# Altium PCB bottom.PcbDoc
Units mil, origin at the board's own origin, x right, y up, seen from the top; angles counter-clockwise.
Board outline 6149.85 x 4650 mil, 2 copper layers (Top Layer, Bottom Layer); 17 components, 14 nets, 128 pads, 36 vias.
Unrouted connection lines stored in the file: 15.
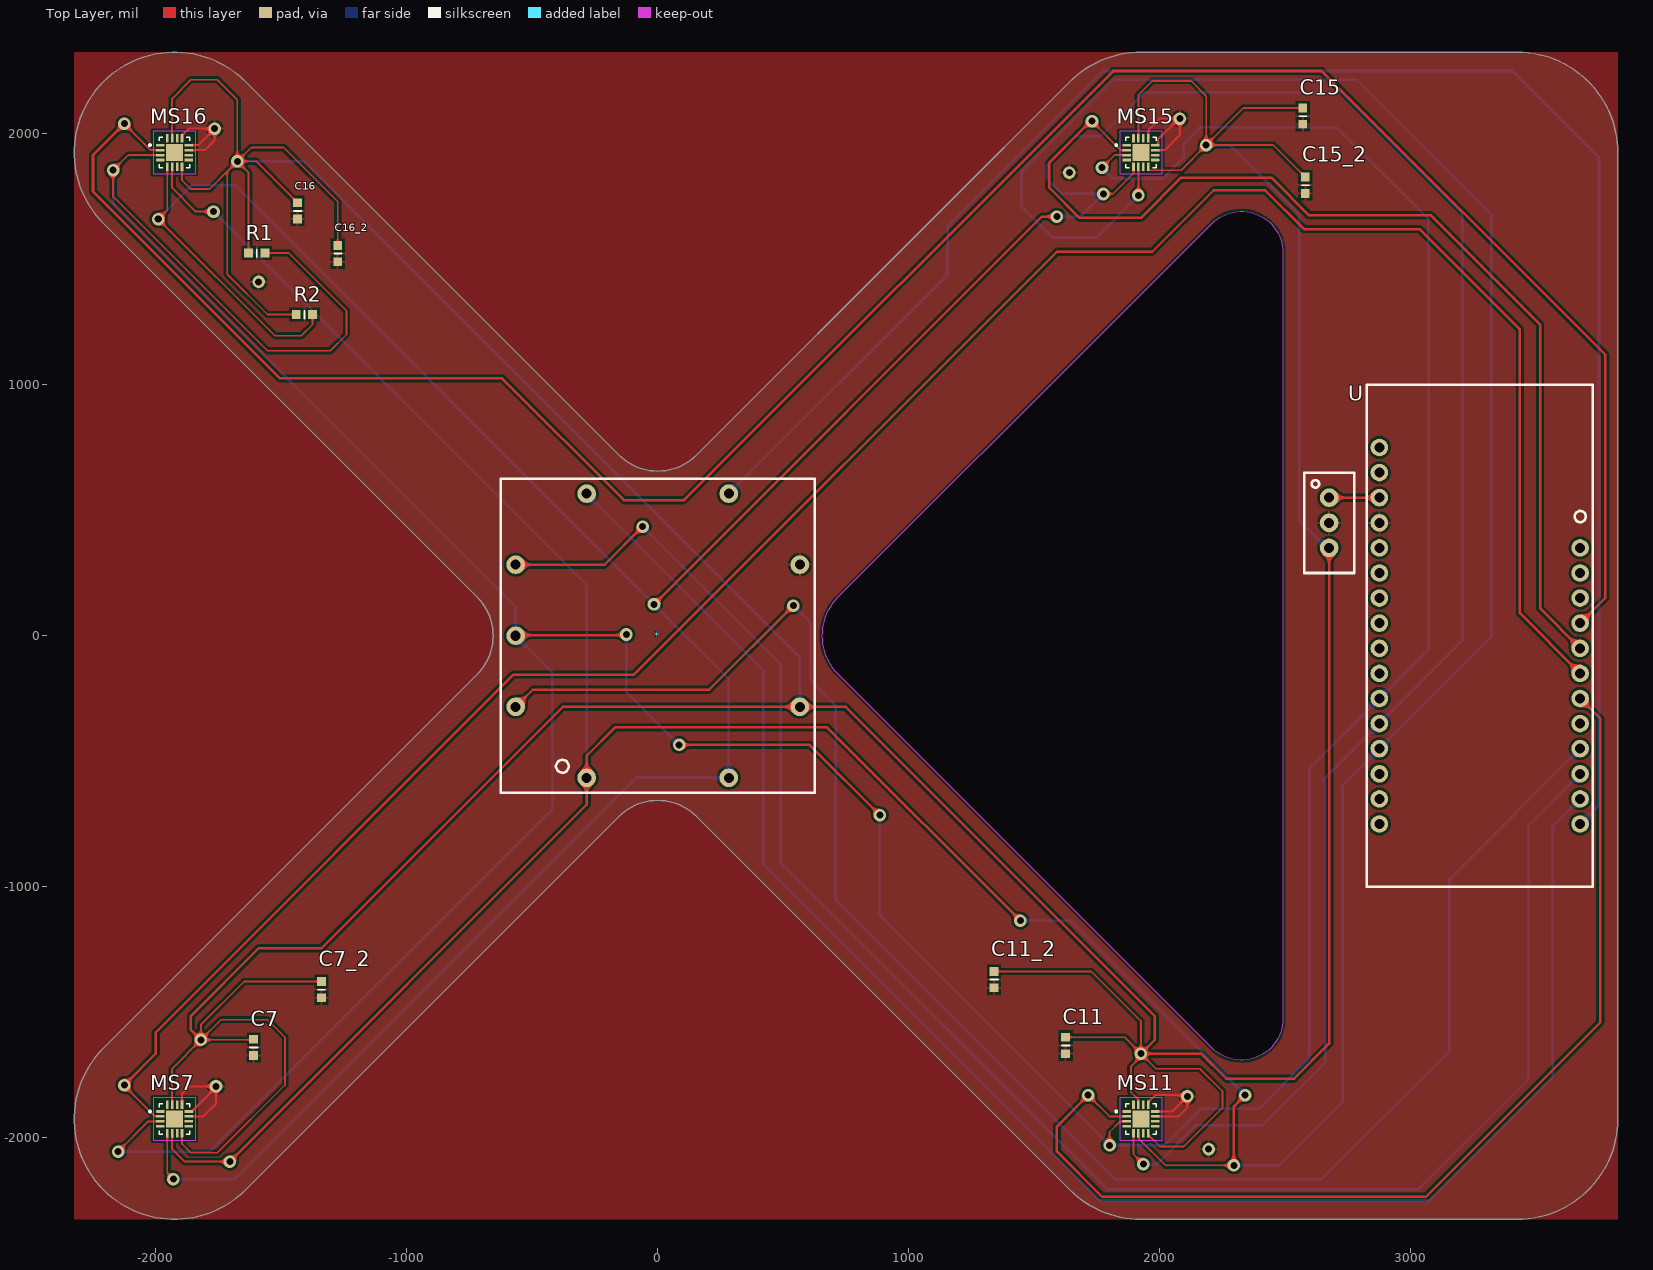
[diagram p0: Top Layer view]
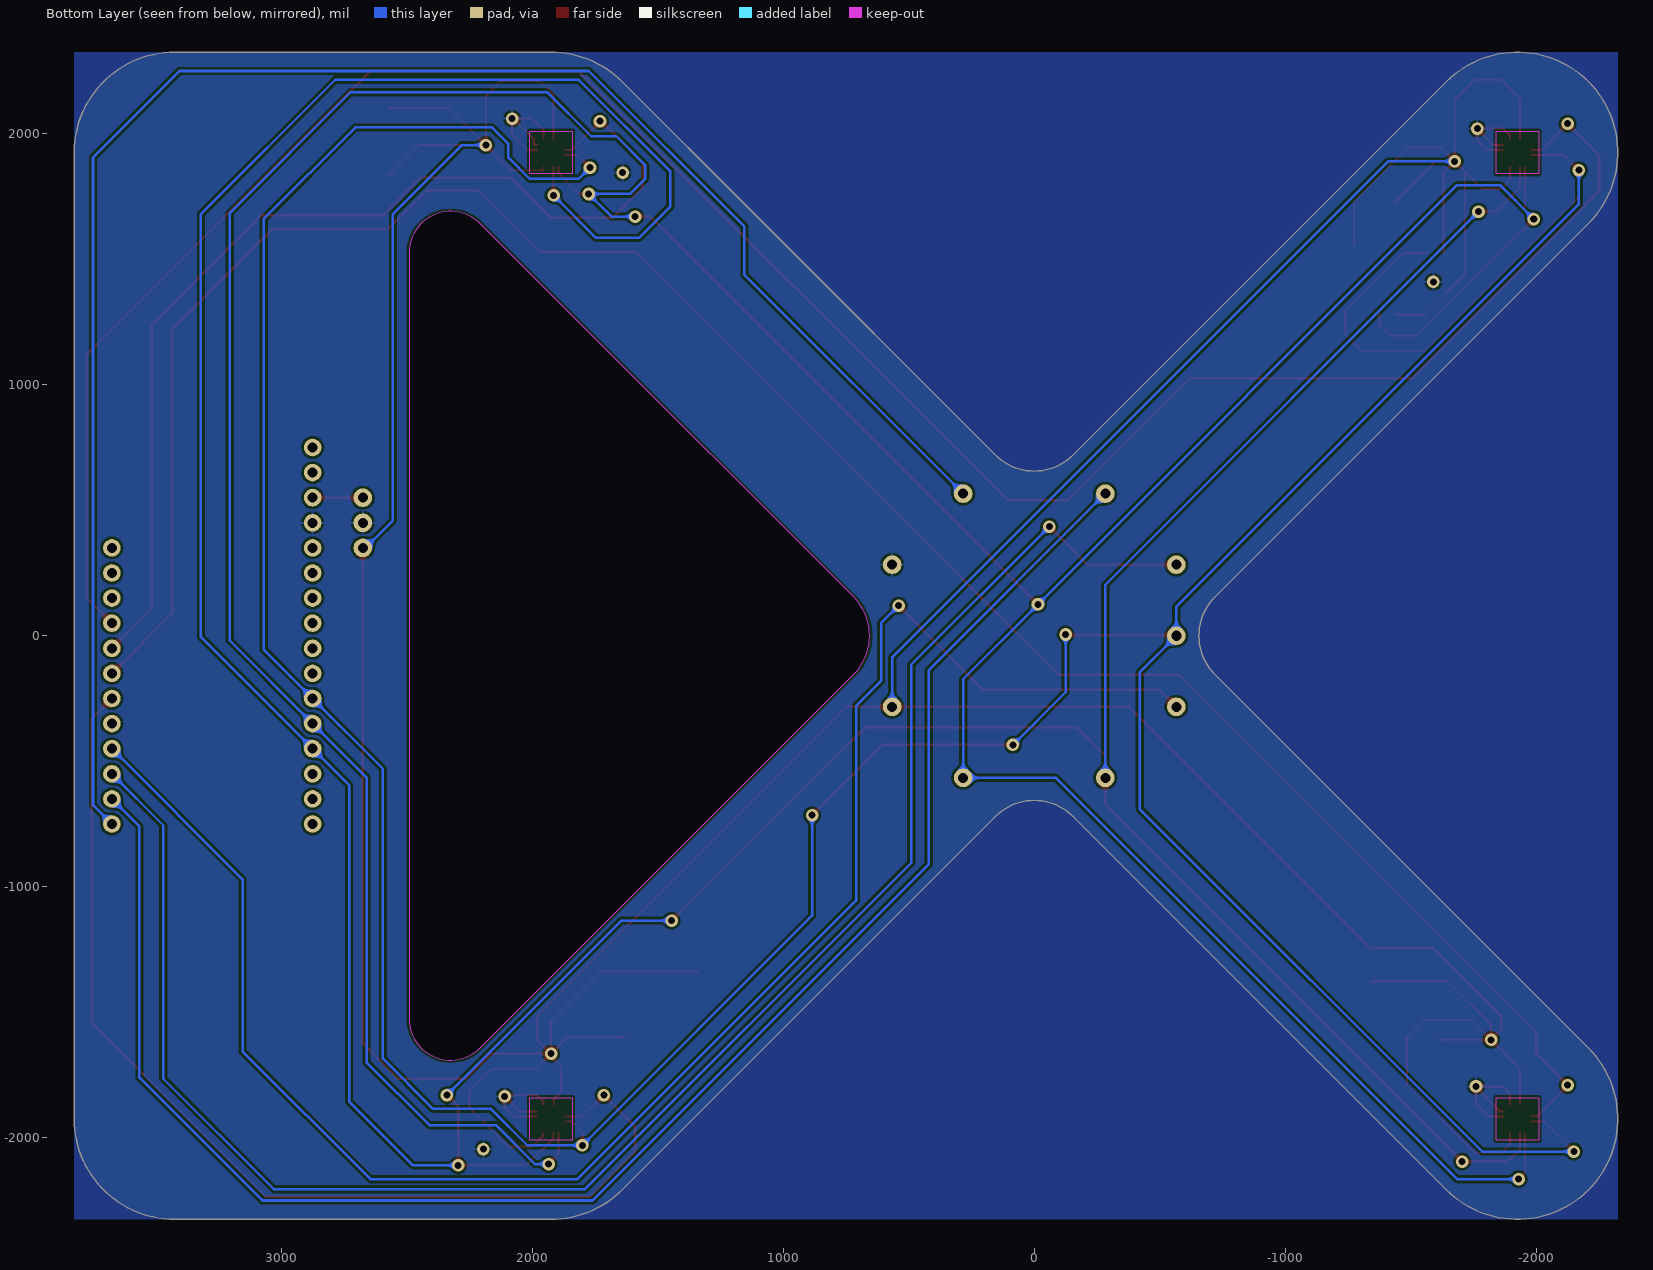
[diagram p1: Bottom Layer view, seen from below]
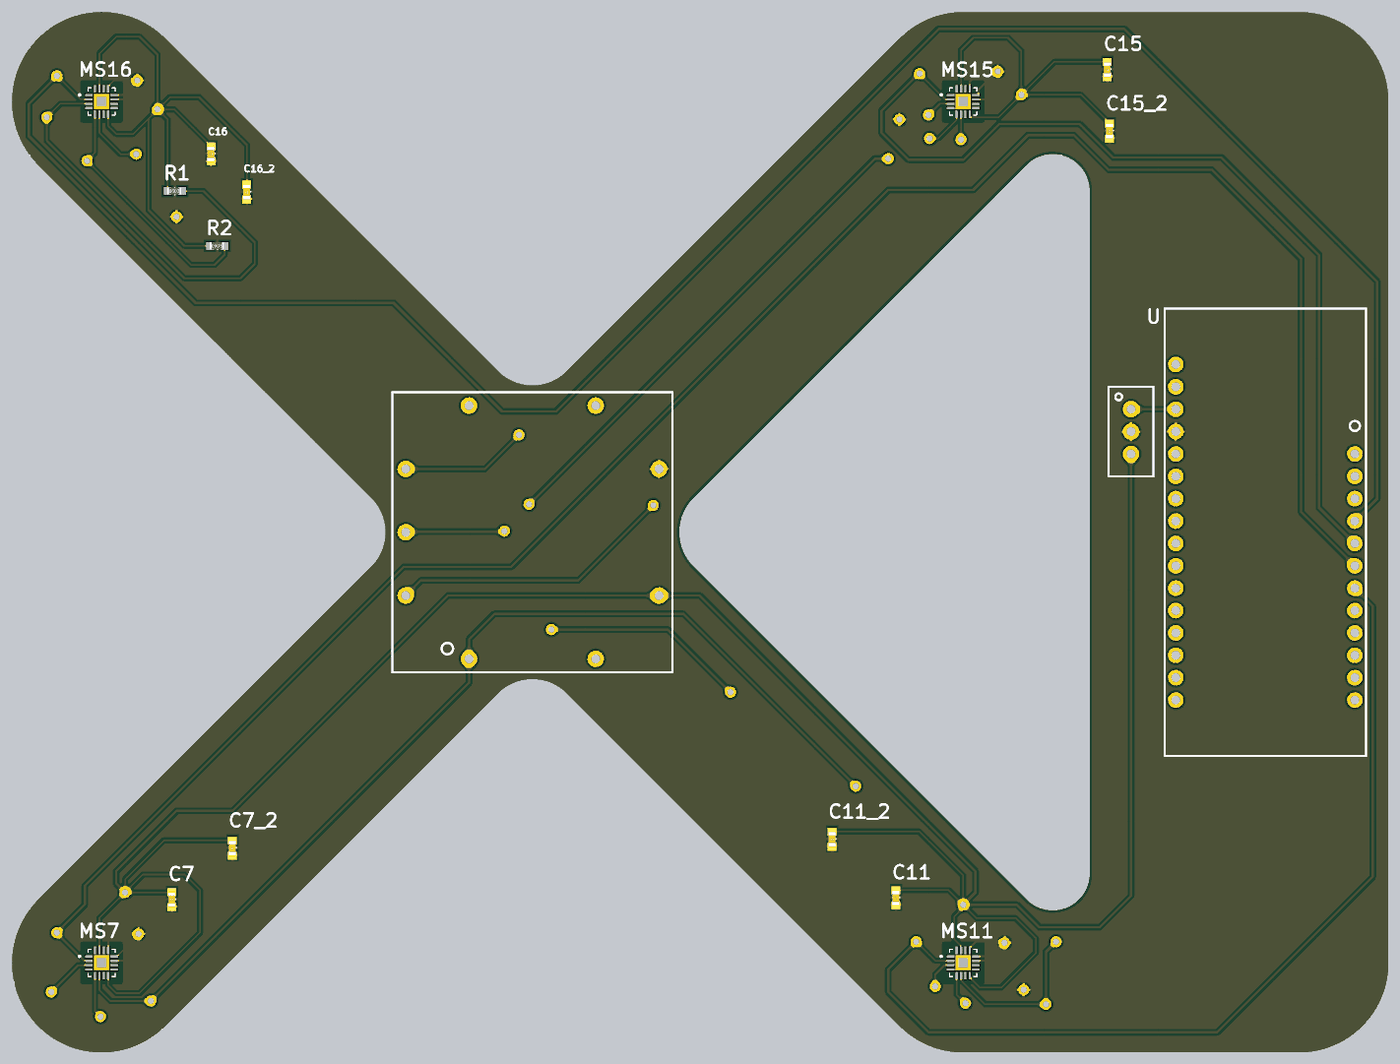
[diagram p2: 3D render of the assembled board from above, using the file's embedded part models]

## Layer stack, top to bottom
Top Solder: solder mask 0.4, Solder Resist, Dk 3.5
Top Layer: signal copper 1.4
Dielectric 1: dielectric 12.6, FR-4, Dk 4.8
Bottom Layer: signal copper 1.4
Bottom Solder: solder mask 0.4, Solder Resist, Dk 3.5

## Board outline
-1642.16,-2207.84 cw(c-1925,-1925) -2207.84,-1642.16 -719.9,-154.21 ccw(c-874.31,0) -720.1,154.42 -2012.84,1447.16 -2207.84,1642.16 cw(c-1925,1925) -1642.16,2207.84 -1367.16,1932.84 -154.21,719.9 ccw(c0,874.31) 154.31,720 1117.66,1683.35 1642.16,2207.84 cw(c1925,1925) 1925,2325 3425,2325 cw(c3425,1925) 3825,1925 3825,-1925 cw(c3425,-1925) 3425,-2325 1925,-2325 cw(c1925,-1925) 1642.16,-2207.84 154.42,-720.1 ccw(c0,-874.31) -154.42,-720.1
cut-out: 2207.79,-1642.11 720,-154.31 cw(c874.31,0) 720.1,154.42 1847.84,1282.16 2207.84,1642.16 2207.79,1642.11 cw(c2325,1525) 2490.69,1525 2490.69,-1525 cw(c2325,-1525)

## Design rules (kind name [scope] priority, off if disabled: settings)
Clearance [All] p1: gap=10 ignorepadtopadclearanceinfootprint=FALSE except(0: Arc-Hole Track-Hole SMDPad-Hole THPad-Hole Via-Hole Fill-Hole Poly-Hole Region-Hole Text-Hole)
PolygonConnect [All] p1: connectstyle=Relief reliefconductorwidth=10 reliefentries=4 polygonreliefangle="90 Angle" airgapwidth=10
RoutingVias [All] p1: holewidth=28 width=50 viastyle="Through Hole" minholewidth=28 minwidth=50 maxholewidth=28 maxwidth=50
SolderMaskExpansion [All] p1: expansion=4 istentingtop=FALSE
Width [All] p1: maxlimit=10 minlimit=8 preferedwidth=10 bottomlayer_minwidth=10 minimp=50.000000 maximp=50.000000 favimp=50.000000
30 further rules are at their usual default settings.

## Classes and differential pairs
component class MAGNETO: * C7 C7_2 C11 C11_2 C15 C15_2 C16 C16_2 MS7 MS11 MS15 MS16 R1 R2

## Components (designator, comment, footprint, x,y, rotation, side; value= is the part's Value field where it differs from the comment)
* "PIN9_small" PIN9_small 0,0 r0 top
C7 "0.1uF" CAP_0603 -1610,-1640 r90 top
C7_2 "0.1uF" CAP_0603 -1340,-1410 r90 top
C11 "0.1uF" CAP_0603 1625,-1632.5 r90 top
C11_2 "0.1uF" CAP_0603 1340,-1370 r90 top
C15 "0.1uF" CAP_0603 2570,2070 r90 top
C15_2 "0.1uF" CAP_0603 2580,1795 r90 top
C16 "0.1uF" CAP_0603 -1435,1692.5 r90 top
C16_2 "0.1uF" CAP_0603 -1275,1522.5 r90 top
MS7 "MLX90393" MLX90393 -1925,-1925 r0 top
MS11 "MLX90393" MLX90393 1925,-1925 r0 top
MS15 "MLX90393" MLX90393 1925,1925 r0 top locked
MS16 "MLX90393" MLX90393 -1925,1925 r0 top
R1 "10k" RES_0603 -1597.5,1525 r0 top
R2 "10k" RES_0603 -1407.5,1280 r0 top
U "52832" feather 3275,0 r0 top
? "REGULATOR" "linear regulator" 2675,450 r0 top

## Footprints (in the part's own frame and the unit in brackets; to place one, negate y for a bottom-side part, rotate by r counter-clockwise, add the part's x,y. Pads: shape width x height; smd on the part's side, far side on the other; paste and mask are expansions set on the pad)
CAP_0603 [mil]
  rect 35x35 smd: 1(-32.5,0) 2(32.5,0)
  silkscreen extent 0,-16 0,14, body extent -53,-18 49,21, height 35
feather [mil]
  round 70 hole 40: 1(400,350) 2(400,250) 3(400,150) 4(400,50) 5(400,-50) 6(400,-150) 7(400,-250) 8(400,-350) 9(400,-450) 10(400,-550) 11(400,-650) 12(400,-750) 13(-400,750) 14(-400,650) 15(-400,550) 16(-400,450) 17(-400,350) 18(-400,250) 19(-400,150) 20(-400,50) 21(-400,-50) 22(-400,-150) 23(-400,-250) 24(-400,-350) 25(-400,-450) 26(-400,-550) 27(-400,-650) 28(-400,-750)
  silkscreen extent -450,-1000 450,1000
"linear regulator" [mil]
  round 74 hole 40: 1(0,100) 2(0,0) 3(0,-100)
  silkscreen extent -100,-200 100,200
MLX90393 [mm]
  rrect25% 0.86x0.26 smd: 1(-1.435,0.75) 2(-1.435,0.25) 3(-1.435,-0.25) 4(-1.435,-0.75) 9(1.435,-0.75) 10(1.435,-0.25) 11(1.435,0.25) 12(1.435,0.75)
  rrect25% 0.26x0.86 smd: 5(-0.75,-1.435) 6(-0.25,-1.435) 7(0.25,-1.435) 8(0.75,-1.435) 13(0.75,1.435) 14(0.25,1.435) 15(-0.25,1.435) 16(-0.75,1.435)
  rect 1.71x1.71 smd paste-2: 17(0,0)
  silkscreen extent -2.59,-1.55 1.55,1.55
PIN9_small [mil]
  round 74 hole 40: 1(-283,-566) 2(283,-566) 3(566,-283) 4(566,283) 5(283,566) 6(-283,566) 7(-566,283) 8(-566,0) 9(-566,-283)
  silkscreen extent -626,-626 626,626
RES_0603 [mil]
  rect 35x35 smd: 1(-32.5,0) 2(32.5,0)
  silkscreen extent 0,-16 0,14, body extent -34,-16 29,16, height 18

## Part data
C7 C7_2 C11 C11_2 C15 C15_2 C16 C16_2: library part CAP, "capacitance"
MS7 MS11 MS15 MS16: "sensor"
R1 R2: library part RES, "resistance"
U: library part Feather, "IC"
?: "linear regulator"

## Via types
v1: diameter 50, hole 28, Top Layer to Bottom Layer, 36 vias

## Nets (pads, with @x,y where several pads share a name; then routed paths per layer and width w, separated by ;. In a path a pad name is that pad's centre, name@x,y a point inside that pad or via, vN(x,y) a via of type N, cw(c..) or ccw(c..) an arc to the next point about the centre after c; other vN are vias at no path point)
GND: *.4 ?.2 C7.1 C7_2.1 C11.1 C11_2.1 C15.1 C15_2.1 C16.1 C16_2.1 MS7.11 MS7.12 MS7.13 MS11.11 MS11.12 MS11.13 MS15.11 MS15.12 MS15.13 MS16.11 MS16.12 MS16.13 U.16 | length 2026.2
  Top Layer w8: MS7.13 -1895.47,-1825.47 -1865,-1795 v1(-1760,-1795) v1@-1760,-1798.78 ; MS16.13 -1895.47,1993.31 -1878.78,2010 -1868.78,2020 v1(-1765,2020) ; MS7.11 -1810.16,-1915.16 -1760,-1865 v1@-1760,-1798.78 ; MS7.12 -1856.69,-1895.47 v1@-1760,-1798.78 ; MS16.11 -1805.16,1934.84 -1765,1975 v1(-1765,2020) ; MS16.12 -1830.47,1954.53 v1(-1765,2020) ; MS11.13 1954.53,-1856.69 1981.22,-1830 2105,-1830 v1(2110,-1835) ; MS15.13 1954.53,2014.53 2000,2060 v1@2075,2060 ; MS11.11 2074.84,-1915.16 2110,-1880 v1(2110,-1835) ; MS11.12 2049.53,-1895.47 v1(2110,-1835) ; MS15.11 2019.84,1934.84 2080,1995 v1(2080,2060) v1@2075,2060 ; MS15.12 1992.03,1954.53 1993.15,1955.65 1993.15,1978.15 v1@2075,2060
  other v1: 2195,-2045 -1590,1410 1640,1845
Net*_1: *.1 MS7.6 MS11.6 MS15.6 MS16.6 U.25 | length 17104.1
  Top Layer w7: MS7.6 -1934.84,-2045.16 -1885,-2095 v1(-1705,-2095) ; MS16.6 -1934.84,1784.84 -1840,1690 v1(-1770,1690) ; MS11.6 1916.22,-1982.56 1916.22,-2003.27 2022.96,-2110 v1(2295,-2110) ; v1(1915.16,1754.84) MS15.6
  Top Layer w10: v1(-1705,-2095) -283,-673 *.1 -283,-478 -170,-365 675,-365 v1(1445,-1135) ; v1(2295,-2110) 2295,-1875 v1(2340,-1830)
  Bottom Layer w10: v1(-1770,1690) -283,203 *.1 ; v1(1445,-1135) 1645,-1135 v1(2340,-1830) ; v1(1915.16,1754.84) 1745.31,1585 1575,1585 1450,1710 1450,1850 1815,2215 2785,2215 3320,1680 3320,-5 U.25 2730,-595 2730,-1855 2475,-2110 v1(2295,-2110)
Net*_2: *.2 MS7.5 MS11.5 MS15.5 MS16.5 R2.2 U.24 | length 17265.7
  Top Layer w7: MS7.5 -1954.53,-2139.32 -1930,-2163.85 v1(-1930,-2165) ; MS16.5 -1954.53,1695.47 v1(-1990,1660) -1525,1195 -1420,1195 -1375,1240 R2.2 ; v1(1775,1760) 1813.22,1760 1895.47,1842.26 MS15.5 ; MS11.5 1895.47,-2065.47 v1(1935,-2105)
  Top Layer w10: v1(-15,125) 1530,1670 v1(1590,1670)
  Bottom Layer w10: v1(-1990,1660) -1855,1795 -1685,1795 v1(-15,125) 283,-173 *.2 -86,-566 -1685,-2165 v1(-1930,-2165) ; v1(1590,1670) 1685,1670 v1(1775,1760) 1610,1760 1550,1820 1550,1875 1665,1990 1765,1990 1940,2165 2725,2165 3205,1685 3205,-20 U.24 2660,-565 2660,-1700 2410,-1950 2145,-1950 1990,-2105 v1(1935,-2105)
Net*_3: *.3 ?.3 C7.2 C7_2.2 C11.2 C11_2.2 C15.2 C15_2.2 C16.2 C16_2.2 MS7.8 MS7.15 MS11.8 MS11.15 MS15.8 MS15.15 MS16.8 MS16.15 R1.1 R2.1 | length 22641.3
  Top Layer w7: MS7.15 -1934.84,-1724.84 v1(-1820,-1610) ; MS16.15 -1934.84,2140.16 -1860,2215 -1755,2215 -1675,2135 v1(-1675,1890) ; MS7.8 -1895.47,-2024.53 -1860,-2060 -1755,-2060 -1485,-1790 -1485,-1600 -1555,-1530 -1740,-1530 v1(-1820,-1610) ; MS16.8 -1895.47,1815.47 -1860,1780 -1785,1780 -1715,1850 ; R1.1 -1630,1845 v1(-1675,1890) ; C7.2 -1612.5,-1610 v1(-1820,-1610) ; R2.1 -1555,1280 -1715,1440 -1715,1850 ; C16.2 -1600,1890 v1(-1675,1890) ; C7_2.2 -1647.5,-1377.5 -1820,-1550 v1(-1820,-1610) ; C16_2.2 -1275,1730 -1490,1945 -1620,1945 v1(-1675,1890) ; C11_2.2 1727.5,-1337.5 1925,-1535 v1(1925,-1665) ; C11.2 1860,-1600 v1(1925,-1665) ; MS11.15 1914.09,-1867.44 1914.09,-1846.73 1885,-1817.64 1885,-1716.64 1925,-1676.64 v1(1925,-1665) ; MS15.15 1915.16,2155.16 1970,2210 2125,2210 2185,2150 v1(2185,1955) ; MS11.8 1954.53,-1988.38 2001.15,-2035 2095,-2035 2250,-1880 2250,-1815 2160,-1725 1985,-1725 v1(1925,-1665) ; MS15.8 1954.53,1856.69 1956.15,1855.07 1960.17,1855.07 1960.25,1855 2085,1855 v1(2185,1955) ; C15.2 2332.5,2102.5 v1(2185,1955) ; C15_2.2 2452.5,1955 v1(2185,1955) ; -1715,1850 v1(-1675,1890)
  Top Layer w10: v1(-1820,-1610) -1860,-1570 -1860,-1515 -1590,-1245 -1340,-1245 -378,-283 *.3 748,-283 1980,-1515 1980,-1610 v1(1925,-1665) 2165,-1665 2265,-1765 2535,-1765 2675,-1625 ?.3
  Bottom Layer w10: v1(-1675,1890) -1410,1890 566,-86 *.3 ; v1(2185,1955) 2280,1955 2555,1680 2555,460 2665,350 ?.3
Net*_5: *.5 U.12 | length 7106
  Bottom Layer w10: *.5 1155,1438 1155,1630 1775,2250 3405,2250 3750,1905 3750,-675 U.12
Net*_6: *.6 U.11 | length 6825.8
  Bottom Layer w10: *.6 420,-137 420,-910 1760,-2250 3075,-2250 3565,-1760 3565,-760 U.11
Net*_7: *.7 U.10 | length 7137.4
  Top Layer w10: *.7 -212,283 v1(-60,435)
  Bottom Layer w10: v1(-60,435) 490,-115 490,-905 1790,-2205 3030,-2205 3470,-1765 3470,-755 U.10
Net*_8: *.8 MS7.3 MS11.3 MS15.3 MS16.3 R1.2 U.23 | length 17733.8
  Top Layer w7: v1(-2150,-2055) -2029.84,-1934.84 MS7.3 ; MS16.3 -2109.84,1915.16 v1(-2170,1855) -2170,1750 -1555,1135 -1305,1135 -1240,1200 -1240,1295 -1470,1525 R1.2 ; v1(1770,1865) 1820.16,1915.16 MS15.3 ; v1(1800,-2030) 1800,-1977.1 1842.26,-1934.84 MS11.3
  Top Layer w10: *.8 -563.5,2.5 -127.5,2.5 v1(-125,5) ; v1(85,-435) 605,-435 v1(885,-715)
  Bottom Layer w10: v1(-2170,1855) -2170,1720 -566,116 *.8 -420,-146 -420,-690 -1785,-2055 v1(-2150,-2055) ; v1(-125,5) -125,-225 v1(85,-435) ; v1(885,-715) 885,-1115 v1(1800,-2030) 2020,-2030 2165,-1885 2395,-1885 2595,-1685 2595,-530 U.23 3070,-55 3070,1660 2705,2025 2160,2025 2095,1960 2095,1905 2010,1820 1815,1820 v1(1770,1865)
Net*_9: *.9 U.9 | length 7054.8
  Top Layer w10: *.9 -498,-215 205,-215 v1(540,120)
  Bottom Layer w10: v1(540,120) 610,50 610,-180 710,-280 710,-1055 1820,-2165 2645,-2165 3154.26,-1655.74 3154.26,-970.74 U.9
Net_1: ?.1 U.15 | length 200
  Top Layer w10: ?.1 U.15
NetMS7_2: MS7.2 U.6 | length 8982.5
  Top Layer w7: v1(-2125,-1790) -2125,-1792.36 -2003.27,-1914.09 -1982.56,-1914.09 MS7.2
  Top Layer w10: v1(-2125,-1790) -2000,-1665 -2000,-1580 -575,-155 -95,-155 1590,1530 1970,1530 2215,1775 2420,1775 2575,1620 3035,1620 3435,1220 3435,90 U.6
NetMS11_2: MS11.2 U.7 | length 4316.1
  Top Layer w7: v1(1715,-1830) 1800.16,-1915.16 MS11.2
  Top Layer w10: v1(1715,-1830) 1590,-1955 1590,-2055 1770,-2235 3060,-2235 3755,-1540 3755,-330 U.7
NetMS15_2: MS15.2 U.5 | length 4194.1
  Top Layer w7: v1(1730,2050) 1845.16,1934.84 MS15.2
  Top Layer w10: v1(1730,2050) 1725,2050 1560,1885 1560,1785 1680,1665 1925,1665 2085,1825 2445,1825 2595,1675 3080,1675 3515,1240 3515,110 U.5
NetMS16_2: MS16.2 U.4 | length 9331.1
  Top Layer w7: v1(-2125,2040) -2019.84,1934.84 MS16.2
  Top Layer w10: v1(-2125,2040) -2250,1915 -2250,1770 -1505,1025 -620,1025 -135,540 105,540 1815,2250 2645,2250 3775,1120 3775,150 U.4
pads on no net: MS7.1 MS7.4 MS7.7 MS7.9 MS7.10 MS7.14 MS7.16 MS7.17 MS11.1 MS11.4 MS11.7 MS11.9 MS11.10 MS11.14 MS11.16 MS11.17 MS15.1 MS15.4 MS15.7 MS15.9 MS15.10 MS15.14 MS15.16 MS15.17 MS16.1 MS16.4 MS16.7 MS16.9 MS16.10 MS16.14 MS16.16 MS16.17 U.1 U.2 U.3 U.8 U.13 U.14 U.17 U.18 U.19 U.20 U.21 U.22 U.26 U.27 U.28

## Polygon pours and split planes (outlines as drawn)
GND on Top Layer "GND_L01_P002" (solid, remove dead copper, pour order 2): -2325,-2325 -2325,2325 3825,2325 3825,-2325
GND on Top Layer "GND_L01_P000" (solid, remove dead copper, pour order 0): -2010,-1840
GND on Bottom Layer "GND_L02_P004" (solid, remove dead copper, pour order 4): -2325,-2325 -2325,2325 3825,2325 3825,-2325
GND on Bottom Layer "GND_L02_P001" (solid, remove dead copper, pour order 1): -2010,2010

## Keep-outs
Top Layer:
  rectangle: 1840,-2010 2010,-1840
  rectangle: 1840,1840 2010,2010
  rectangle: -2010,1840 -1840,2010
  rectangle: -2010,-2010 -1840,-1840
Bottom Layer:
  rectangle: 1840,1840 2010,2010
  rectangle: 1840,-2010 2010,-1840
  rectangle: -2010,-2010 -1840,-1840
  rectangle: -2010,1840 -1840,2010

## Silkscreen, mask and mechanical layers (free items; w line width, h text height)
Mechanical 1:
  lines w10: 2207.79,1642.11 cw(c2325,1525) 2490.69,1525 2490.69,-1525 cw(c2325,-1525) 2207.79,-1642.11 720,-154.31 cw(c874.31,0) 720.1,154.42 1847.84,1282.16 2207.84,1642.16 ; 1117.66,1683.35 154.31,720 cw(c0,874.31) -154.21,719.9 -1367.16,1932.84 -1642.16,2207.84 ccw(c-1925,1925) -2207.84,1642.16 -2012.84,1447.16 -720.1,154.42 cw(c-874.31,0) -719.9,-154.21 -2207.84,-1642.16 ccw(c-1925,-1925) -1642.16,-2207.84 -154.42,-720.1 cw(c0,-874.31) 154.42,-720.1 1642.16,-2207.84 ccw(c1925,-1925) 1925,-2325 3425,-2325 ccw(c3425,-1925) 3825,-1925 3825,1925 ccw(c3425,1925) 3425,2325 1925,2325 ccw(c1925,1925) 1642.16,2207.84 1117.66,1683.35 ; 1117.66,1683.35 1117.66,1683.35